# Allegro board CLAYc6r3.brd
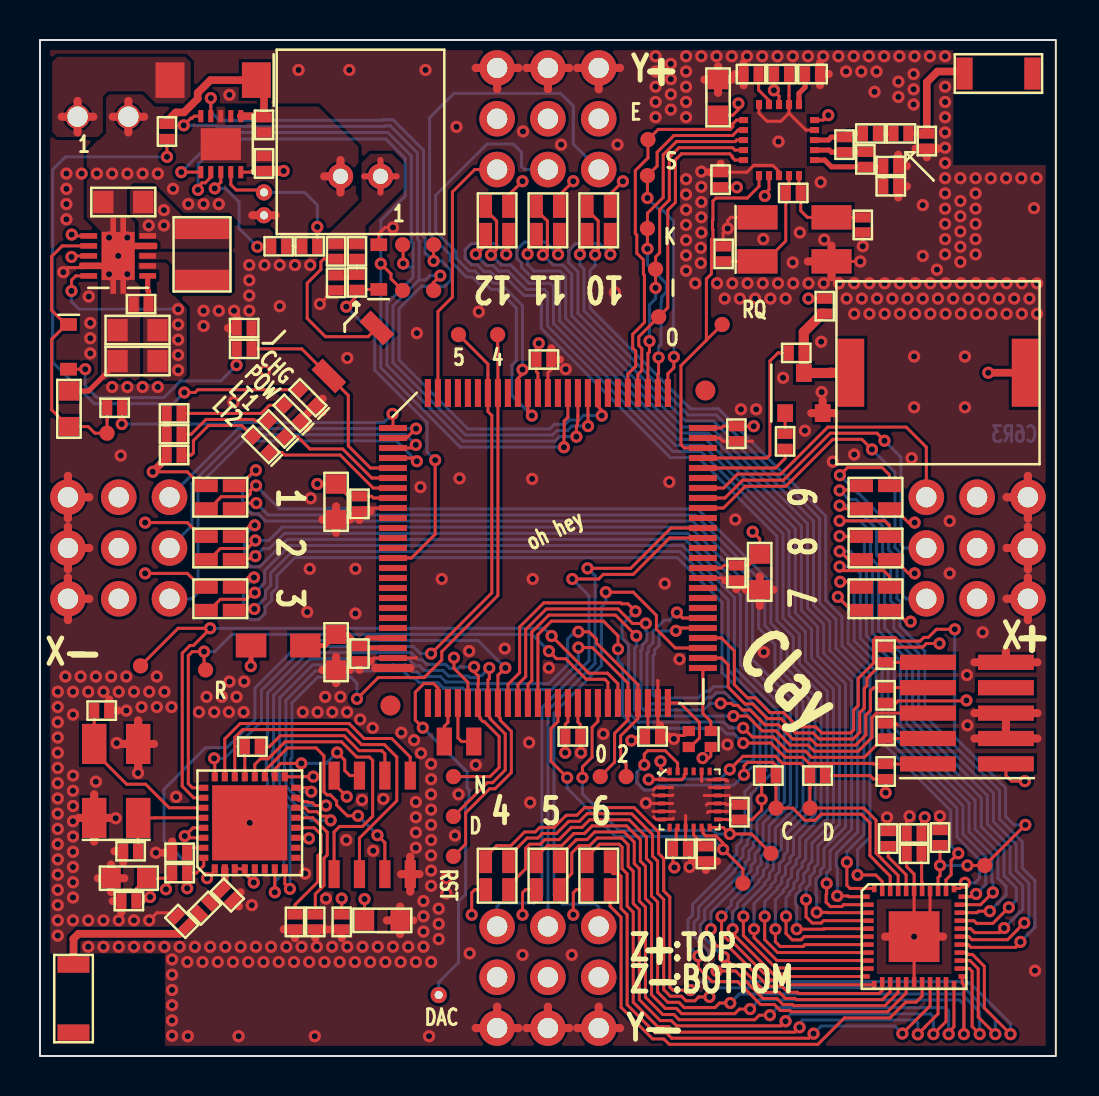
[diagram p0: board, top side]
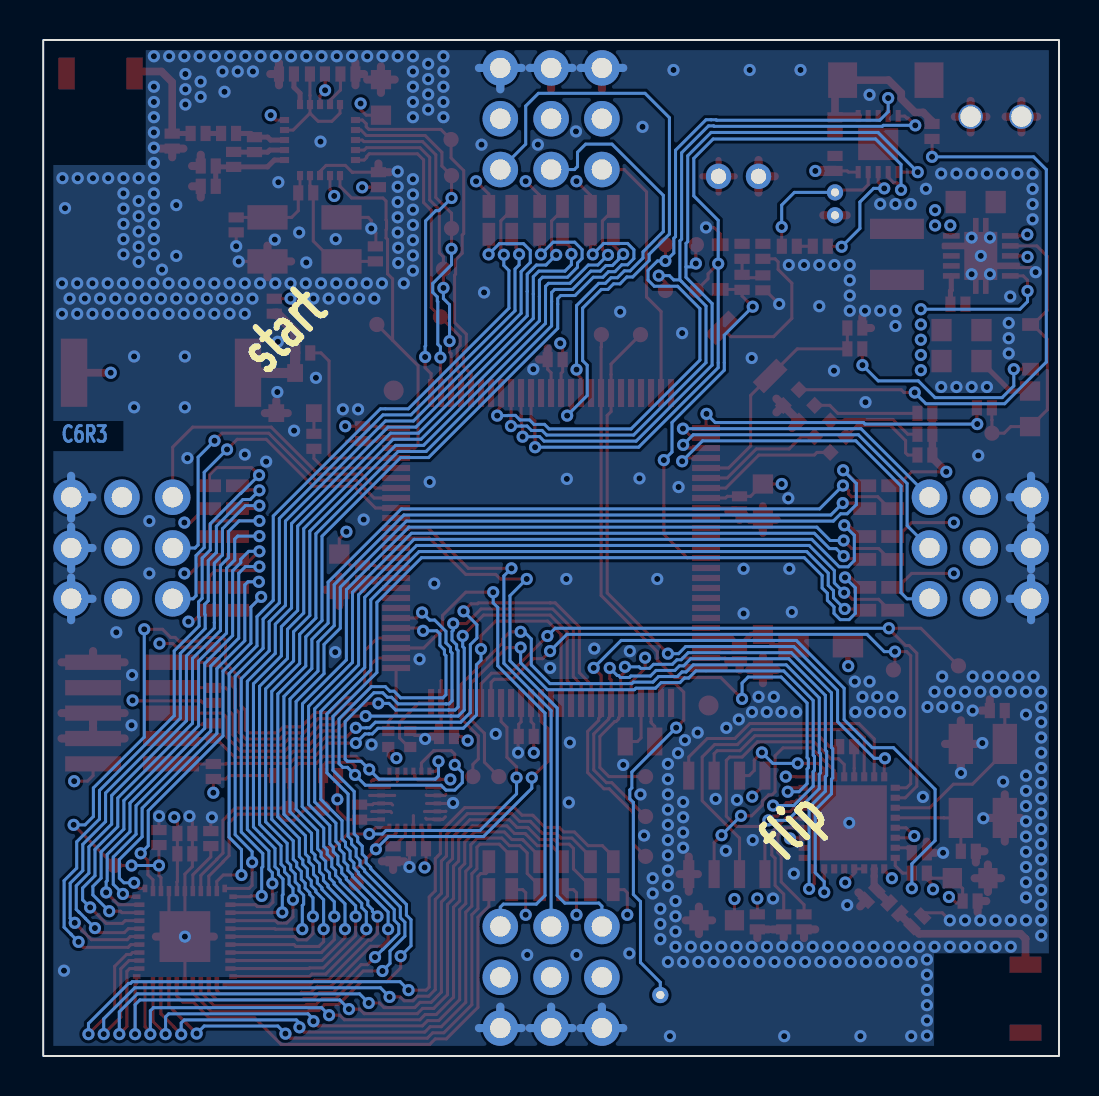
[diagram p1: board, bottom side, seen from below]

Outline 50.8 x 50.8 mm; copper layers: TOP, GND, PWR, BOTTOM. Coordinates in mm from the lower left corner of the outline.

## Placement (name value [footprint] x y rotation side)
AE1  2450AT18A100E  [ANT_1206]  47.93 49.12 0 top
AE2  2450AT18A100E  [ANT_1206]  1.68 2.87 270 top
C1  1uF  [C0402]  11.2 44.63 90 top
C3  1uF  [C0402]  11.2 46.56 270 top
C4  .1uf  [C0402]  34.98 12.19 90 top
C5  .1uf  [C0402]  32.03 10.36 0 top
C6  .1uf  [C0402]  33.3 10.11 270 top
C7  .1uf  [C0402]  34.04 43.81 90 top
C8  .1uf  [C0402]  37.08 49.1 0 top
C9  10uF  [C0603]  33.91 47.93 90 top
C10  1.5pF  [C0402]  43.05 46.13 0 top
C11  1.0pF  [C0402]  44.35 45.75 270 top
C12  2200pF  [C0402]  42.55 44.5 0 top
C13  4.7pF  [C0402]  42.55 43.48 0 top
C14  22pF  [C0402]  34.19 40.11 90 top
C15  22pF  [C0402]  41.15 41.55 270 top
C16  .033uF  [C0402]  35.56 49.1 180 top
C17  1uF  [C0402]  43.71 10.11 180 top
C18  .1uf  [C0402]  43.71 11.13 180 top
C19  .1uf  [C0402]  15.98 20.12 270 top
C20  10uF  [C0603]  14.81 20.19 270 top
C21  .1uf  [C0402]  15.98 27.61 270 top
C22  .1uf  [C0402]  30.63 15.98 0 top
C23  .1uf  [C0402]  25.2 34.82 0 top
C24  .1uf  [C0402]  26.64 15.98 0 top
C25  .1uf  [C0402]  34.82 31.11 270 top
C26  .1uf  [C0402]  34.82 24.16 270 top
C27  10uF  [C0603]  35.99 24.21 270 top
C28  10uF  [C0603]  14.81 27.71 270 top
C29  10uF  [C0805]  4.88 34.75 180 top
C30  10uF  [C0805]  4.17 42.7 180 top
C31  10uF  [C0805]  4.88 36.3 180 top
C32  .1uf  [C0402]  5.05 37.59 180 top
C33  10uF  [C0603]  4.45 8.89 180 top
C34  10uF  [C0603]  17.12 6.78 0 top
C35  .1uf  [C0402]  4.45 7.75 180 top
C36  .1uf  [C0402]  15.09 6.71 270 top
C37  5.6pF  [C0402]  8.23 7.39 225 top
C38  15pF  [C0402]  4.53 10.24 180 top
C39  15pF  [C0402]  3.09 17.27 0 top
C40  10uF  [C0603]  1.45 32.36 90 top
D1  SE20AFJ-M3/6A  [DO_221AC]  8.66 48.79 180 top
D2  4148  [SOD323]  1.42 35.46 270 top
DS1  LB_QH9G_N100_35_1  [LED_0402]  13.39 32.92 135 top
DS2  LB_QH9G_N100_35_1  [LED_0402]  11.83 31.36 135 top
DS3  LB_QH9G_N100_35_1  [LED_0402]  11.05 30.57 135 top
DS4  -  [LTST_C19FD1WT]  27.94 41.78 90 top
DS5  -  [LTST_C19FD1WT]  25.4 41.78 90 top
DS6  -  [LTST_C19FD1WT]  22.86 41.78 90 top
DS7  -  [LTST_C19FD1WT]  9.02 27.94 180 top
DS8  -  [LTST_C19FD1WT]  9.02 25.4 180 top
DS9  -  [LTST_C19FD1WT]  9.02 22.86 180 top
DS10  -  [LTST_C19FD1WT]  27.94 9.02 270 top
DS11  -  [LTST_C19FD1WT]  25.4 9.02 270 top
DS12  -  [LTST_C19FD1WT]  22.86 9.02 270 top
DS13  -  [LTST_C19FD1WT]  41.78 22.86 0 top
DS14  -  [LTST_C19FD1WT]  41.78 25.4 0 top
DS15  -  [LTST_C19FD1WT]  41.78 27.94 0 top
DS16  LB_QH9G_N100_35_1  [LED_0402]  12.61 32.14 135 top
J1  640456-2  [2X1_HEADER_100]  1.88 46.96 0 top
J2  S2B-PH-K-S(LF)(SN)  [JST2_SIDE_PTH]  16.03 46.58 0 top
J3  GPIO_3x3_100  [GPIO_3X3_100]  25.4 3.94 0 top
J4  GPIO_3x3_100  [GPIO_3X3_100]  25.4 46.86 180 top
J5  GPIO_3x3_100  [GPIO_3X3_100]  3.94 25.4 270 top
J6  GPIO_3x3_100  [GPIO_3X3_100]  46.86 25.4 90 top
J7  2x5 SMT  [FTSH_10]  46.35 17.14 90 top
L1  3.9nH  [L0402]  41.53 46.13 0 top
L2  8.2nH  [L0402]  40.23 45.57 90 top
L3  2.7nH  [L0402]  41.27 44.83 270 top
L4  600 Ohm  [FERRITE0805]  11.91 20.52 180 top
L5  2.2uH  [L1210]  8.1 40.08 270 top
L6  DNP  [L0402]  9.37 8.05 135 top
L7  DNP  [L0402]  7.09 6.73 315 top
LS1  PKMCS0909E4000-R1  [PKMCS]  44.91 34.16 0 top
NOREF  -  []  0 50.8 0 top
NOREF#2  -  []  0 0 90 top
NOREF#3  -  []  25.4 25.4 0 top
Q1  3904  [SOT23_3]  38.2 33.15 180 top
R1  200  [R0402]  6.35 46.23 90 top
R2  30  [R0402]  6.71 31.09 180 top
R3  30  [R0402]  6.71 30.05 180 top
R5  10k  [R0402]  13.49 40.49 0 top
R6  3.0k  [R0402]  11.94 40.49 180 top
R7  1.0K  [R0402]  39.24 37.49 90 top
R8  1.0K  [R0402]  37.82 35.15 0 top
R9  1.0K  [R0402]  37.26 30.73 90 top
R10  10k  [R0402]  38.89 14.02 0 top
R11  10k  [R0402]  36.42 14.02 180 top
R12  1M  [R0402]  37.67 43.15 0 top
R13  22k  [R0402]  38.63 49.1 180 top
R14  100k  [R0402]  45.01 10.92 270 top
R15  7.68k  [R0402]  42.42 10.87 270 top
R16  10k  [R0402]  42.29 20.07 270 top
R17  10k  [R0402]  42.29 18.03 90 top
R18  10k  [R0402]  42.29 16.26 270 top
R19  10k  [R0402]  42.29 14.22 90 top
R21  200  [R0402]  6.71 32.13 180 top
R23  10k  [R0402]  12.75 6.71 90 top
R24  10k  [R0402]  13.77 6.71 90 top
R25  10k  [R0402]  6.98 9.14 180 top
R26  200  [R0402]  10.62 15.47 0 top
R27  12k  [R0402]  6.98 10.16 0 top
R28  100k  [R0402]  15.85 40.23 90 top
R29  100k  [R0402]  15.85 38.68 90 top
R30  220k  [R0402]  14.81 38.66 90 top
R31  10k  [R0402]  3.73 32.41 0 top
R32  100k  [R0402]  14.81 40.23 90 top
R33  10k  [R0402]  10.21 35.36 180 top
R34  100k  [R0402]  10.21 36.4 0 top
SW1  B3U-1000P  [TAC_SWITCH_B3U_1000P]  15.65 35.2 225 top
TP1  TP  [TP_030]  38.51 12.4 0 top
TP2  TP  [TP_030]  36.8 12.4 0 top
TP3  TP  [TP_030]  35.15 8.64 0 top
TP4  TP  [TP_030]  36.55 10.13 0 top
TP5  TP  [TP_030]  30.4 45.82 90 top
TP6  TP  [TP_030]  30.38 44.02 90 top
TP7  TP  [TP_030]  30.38 41.38 90 top
TP8  TP  [TP_030]  30.78 39.34 90 top
TP9  TP  [TP_030]  30.94 36.96 90 top
TP10  TP  [TP_030]  34.11 36.58 90 top
TP11  TP  [TP_030]  47.24 9.52 0 top
TP12  TP  [TP_030]  8.28 19.3 0 top
TP13  TP  [TP_030]  5.03 19.51 0 top
TP14  TP  [TP_030]  20.68 9.98 0 top
TP15  TP  [TP_030]  28.02 13.97 0 top
TP16  TP  [TP_030]  29.31 13.97 0 top
TP17  TP  [TP_030]  20.68 11.98 0 top
TP18  TP  [TP_030]  20.68 13.97 0 top
TP19  TP  [TP_030]  19.68 40.56 0 top
TP20  TP  [TP_030]  19.68 38.28 0 top
TP21  TP  [TP_030]  18.14 40.56 0 top
TP22  TP  [TP_030]  18.14 38.28 0 top
TP23  TP  [TP_030]  3.35 31.14 0 top
TP24  TP  [TP_030]  20.93 36.07 0 top
TP25  TP  [TP_030]  22.89 36.07 0 top
U1  LM3658  [WSON10_3X3]  9.04 45.59 180 top
U2  MPU9250  [QFN24_3X3]  32.49 12.83 0 top
U3  NRF24L01P  [QFN20_4X4]  36.96 45.8 0 top
U4  IS31FL3236  [QFN44_5X5]  43.71 5.97 0 top
U5  MK64FN1M0VLL12  [QFP100_14X14]  25.4 25.4 0 top
U6  TPS61201DRCT  [VSON10_3X3]  3.91 40 90 top
U7  ESP8266EX  [QFN32_5X5]  10.49 11.66 90 top
U8  W25Q80DVSNIG  [CL_SOIC8]  16.61 11.56 0 top
W1  26AWG  [WIRE_26AWG]  19.94 3.05 0 top
W2  26AWG  [WIRE_26AWG]  11.2 43.18 0 top
W3  26AWG  [WIRE_26AWG]  11.2 42.04 0 top
Y1  16MHz  [TXC_XTAL_5X3]  37.73 40.83 0 top
Y2  8MHz  [ASCO]  32.99 15.85 180 top
Y3  34.728kHz  [ABS06]  20.95 15.72 0 top
Y4  26MHz  [TXC_XTAL_5X3]  3.81 13.75 90 top
Z1  MM3Z3VST1G  [SOD323]  16.94 39.45 90 top

## Library data of the parts
AE1 AE2 = ANTENNA
C1 C3-C40 = CAP_NP
D1 D2 = DIODE
DS1-DS3 DS16 = LED
DS4-DS15 = LTST_C19FD1WT
J1 J2 = CON_2PIN
J3-J6 = GPIO_3X3_100
J7 = CON_10PIN
L1-L3 L5-L7 = INDUCTOR
L4 = FERRITE
LS1 = BUZZER
Q1 = NPN
R1-R3 R5-R19 R21 R23-R34 = RESISTOR
SW1 = SPST_NO
TP1-TP25 = TESTPOINT
U1 = LM3658
U2 = MPU9250
U3 = NRF24L01
U4 = IS31FL3236
U5 = MK64FN1M0VLL12
U6 = TPS61201
U7 = ESP8266EX
U8 = W25Q
W1-W3 = WIRE
Y1 Y4 = CRYSTAL_4
Y2 = ASCO_OSC
Y3 = CRYSTAL
Z1 = ZENER

## Footprints (pads in the part's own frame, mm; a bottom-side part is the same pattern mirrored in y, then rotated)
2X1_HEADER_100
  round 1.219 hole 1.016: 1(0,0) 2(2.54,0)
ABS06
  rect 0.762x1.397 smd: 1(-0.737,0) 2(0.737,0)
ANT_1206
  rect 0.813x1.6 smd: 1(-1.7,0) 2(1.7,0)
ASCO
  rect 0.61x0.508 smd: 1(-0.55,-0.4) 2(0.55,-0.4) 3(0.55,0.4) 4(-0.55,0.4)
C0402
  rect 0.508x0.762 smd: 1(-0.375,0) 2(0.375,0)
C0603
  rect 0.965x1.016 smd: 1(-0.889,0) 2(0.889,0)
C0805
  rect 1.016x1.118 smd: 1(-1,0) 2(1,0)
CL_SOIC8
  rect 0.559x1.397 smd: 1(-1.905,-2.464) 2(-0.635,-2.464) 3(0.635,-2.464) 4(1.905,-2.464) 5(1.905,2.464) 6(0.635,2.464) 7(-0.635,2.464) 8(-1.905,2.464)
DO_221AC
  rect 1.448x1.778 smd: 1(-2.159,0) 2(2.159,0)
FERRITE0805
  rect 1.524x1.194 smd: 1(-1.359,0) 2(1.359,0)
FTSH_10
  rect 0.762x2.794 smd: 1(-2.54,-1.95) 2(-2.54,1.95) 3(-1.27,-1.95) 4(-1.27,1.95) 5(0,-1.95) 6(0,1.95) 7(1.27,-1.95) 8(1.27,1.95) 9(2.54,-1.95) 10(2.54,1.95)
GPIO_3X3_100
  round 1.778 hole 1.016: 1(-2.54,2.54) 2(0,2.54) 3(2.54,2.54) 4(-2.54,0) 5(0,0) 6(2.54,0) 7(-2.54,-2.54) 8(0,-2.54) 9(2.54,-2.54)
JST2_SIDE_PTH
  round 1.27 hole 0.762: 1(1,-2.6) 2(-1,-2.6)
L0402
  rect 0.508x0.762 smd: 1(-0.375,0) 2(0.375,0)
L1210
  rect 1.016x2.692 smd: 1(-1.275,0) 2(1.275,0)
LED_0402
  rect 0.61x0.61 smd: 1(-0.559,0) 2(0.559,0)
LTST_C19FD1WT
  rect 1.143x0.635 smd: 1(0.699,0.572) 2(-0.699,0.572) 3(-0.699,-0.572) 4(0.699,-0.572)
PKMCS
  rect 1.321x3.404 smd: 1(-4.35,0) 2(4.35,0)
QFN20_4X4
  rect 0.457x0.305 smd: 1(-1.775,1.001) 2(-1.775,0.501) 3(-1.775,0.001) 4(-1.775,-0.499) 5(-1.775,-0.999) 11(1.775,-0.999) 12(1.775,-0.499) 13(1.775,0.001) 14(1.775,0.501) 15(1.775,1.001)
  rect 0.305x0.457 smd: 6(-1.001,-1.775) 7(-0.501,-1.775) 8(-0.001,-1.775) 9(0.499,-1.775) 10(0.999,-1.775) 16(0.999,1.775) 17(0.499,1.775) 18(-0.001,1.775) 19(-0.501,1.775) 20(-1.001,1.775)
QFN24_3X3
  rect 0.381x0.203 smd: 1(-1.402,1) 2(-1.402,0.6) 3(-1.402,0.2) 4(-1.402,-0.2) 5(-1.402,-0.6) 6(-1.402,-1) 13(1.412,-1) 14(1.412,-0.6) 15(1.412,-0.2) 16(1.412,0.2) 17(1.412,0.6) 18(1.412,1)
  rect 0.203x0.381 smd: 7(-1,-1.402) 8(-0.6,-1.402) 9(-0.2,-1.402) 10(0.2,-1.402) 11(0.6,-1.402) 12(1,-1.402) 19(1,1.402) 20(0.6,1.402) 21(0.2,1.402) 22(-0.2,1.402) 23(-0.6,1.402) 24(-1,1.402)
QFN32_5X5
  rect 0.457x0.305 smd: 1(-2.301,1.75) 2(-2.301,1.25) 3(-2.301,0.749) 4(-2.301,0.249) 5(-2.301,-0.251) 6(-2.301,-0.752) 7(-2.301,-1.252) 8(-2.301,-1.753) 17(2.301,-1.753) 18(2.301,-1.252) 19(2.301,-0.752) 20(2.301,-0.251) 21(2.301,0.249) 22(2.301,0.749) 23(2.301,1.25) 24(2.301,1.75)
  rect 0.305x0.457 smd: 9(-1.75,-2.301) 10(-1.25,-2.301) 11(-0.749,-2.301) 12(-0.249,-2.301) 13(0.251,-2.301) 14(0.752,-2.301) 15(1.252,-2.301) 16(1.753,-2.301) 25(1.753,2.301) 26(1.252,2.301) 27(0.752,2.301) 28(0.251,2.301) 29(-0.249,2.301) 30(-0.749,2.301) 31(-1.25,2.301) 32(-1.75,2.301)
  rect 3.759x3.759 smd: 33(0,0)
QFN44_5X5
  rect 0.381x0.229 smd: 1(-2.409,1.994) 11(-2.409,-1.994) 23(2.409,-1.994) 33(2.409,1.994)
  rect 0.508x0.229 smd: 2(-2.276,1.595) 3(-2.276,1.196) 4(-2.276,0.798) 5(-2.276,0.399) 6(-2.276,0) 7(-2.276,-0.399) 8(-2.276,-0.798) 9(-2.276,-1.196) 10(-2.276,-1.595) 24(2.276,-1.595) 25(2.276,-1.196) 26(2.276,-0.798) 27(2.276,-0.399) 28(2.276,0) 29(2.276,0.399) 30(2.276,0.798) 31(2.276,1.196) 32(2.276,1.595)
  rect 0.229x0.381 smd: 12(-1.994,-2.409) 22(1.994,-2.409) 34(1.994,2.409) 44(-1.994,2.409)
  rect 0.229x0.508 smd: 13(-1.595,-2.276) 14(-1.196,-2.276) 15(-0.798,-2.276) 16(-0.399,-2.276) 17(0,-2.276) 18(0.399,-2.276) 19(0.798,-2.276) 20(1.196,-2.276) 21(1.595,-2.276) 35(1.595,2.276) 36(1.196,2.276) 37(0.798,2.276) 38(0.399,2.276) 39(0,2.276) 40(-0.399,2.276) 41(-0.798,2.276) 42(-1.196,2.276) 43(-1.595,2.276)
  rect 2.54x2.54 smd: 45(0,0)
QFP100_14X14
  round 1 smd: (-7.874,-7.874) (7.874,7.874)
  rect 1.397x0.305 smd: 1(-7.75,6) 2(-7.75,5.5) 3(-7.75,5) 4(-7.75,4.5) 5(-7.75,4) 6(-7.75,3.5) 7(-7.75,3) 8(-7.75,2.5) 9(-7.75,2) 10(-7.75,1.5) 11(-7.75,1) 12(-7.75,0.5) 13(-7.75,0) 14(-7.75,-0.5) 15(-7.75,-1) 16(-7.75,-1.5) 17(-7.75,-2) 18(-7.75,-2.5) 19(-7.75,-3) 20(-7.75,-3.5) 21(-7.75,-4) 22(-7.75,-4.5) 23(-7.75,-5) 24(-7.75,-5.5) 25(-7.75,-6) 51(7.75,-6) 52(7.75,-5.5) 53(7.75,-5) 54(7.75,-4.5) 55(7.75,-4) 56(7.75,-3.5) 57(7.75,-3) 58(7.75,-2.5) 59(7.75,-2) 60(7.75,-1.5) 61(7.75,-1) 62(7.75,-0.5) 63(7.75,0) 64(7.75,0.5) 65(7.75,1) 66(7.75,1.5) 67(7.75,2) 68(7.75,2.5) 69(7.75,3) 70(7.75,3.5) 71(7.75,4) 72(7.75,4.5) 73(7.75,5) 74(7.75,5.5) 75(7.75,6)
  rect 0.305x1.397 smd: 26(-6,-7.75) 27(-5.5,-7.75) 28(-5,-7.75) 29(-4.5,-7.75) 30(-4,-7.75) 31(-3.5,-7.75) 32(-3,-7.75) 33(-2.5,-7.75) 34(-2,-7.75) 35(-1.5,-7.75) 36(-1,-7.75) 37(-0.5,-7.75) 38(0,-7.75) 39(0.5,-7.75) 40(1,-7.75) 41(1.5,-7.75) 42(2,-7.75) 43(2.5,-7.75) 44(3,-7.75) 45(3.5,-7.75) 46(4,-7.75) 47(4.5,-7.75) 48(5,-7.75) 49(5.5,-7.75) 50(6,-7.75) 76(6,7.75) 77(5.5,7.75) 78(5,7.75) 79(4.5,7.75) 80(4,7.75) 81(3.5,7.75) 82(3,7.75) 83(2.5,7.75) 84(2,7.75) 85(1.5,7.75) 86(1,7.75) 87(0.5,7.75) 88(0,7.75) 89(-0.5,7.75) 90(-1,7.75) 91(-1.5,7.75) 92(-2,7.75) 93(-2.5,7.75) 94(-3,7.75) 95(-3.5,7.75) 96(-4,7.75) 97(-4.5,7.75) 98(-5,7.75) 99(-5.5,7.75) 100(-6,7.75)
R0402
  rect 0.508x0.762 smd: 1(-0.375,0) 2(0.375,0)
SOD323
  rect 0.635x0.838 smd: 1(-1.118,0) 2(1.118,0)
SOT23_3
  rect 0.787x0.889 smd: 1(0.94,1.003) 2(-0.94,1.003) 3(0,-1.003)
TAC_SWITCH_B3U_1000P
  rect 0.787x1.676 smd: 1(-1.7,0) 2(1.7,0)
TP_030
  round 0.762 smd: 1(0,0)
TXC_XTAL_5X3
  rect 2.007x1.219 smd: 1(-1.85,-1.1) 2(1.85,-1.1) 3(1.85,1.1) 4(-1.85,1.1)
VSON10_3X3
  rect 0.279x0.838 smd: 1(-1,-1.475) 2(-0.5,-1.475) 3(0,-1.475) 4(0.5,-1.475) 5(1,-1.475) 6(1,1.475) 7(0.5,1.475) 8(0,1.475) 9(-0.5,1.475) 10(-1,1.475)
  custom 3.8x1.65 smd: 11(0,0)
WIRE_26AWG
  round 0.813 hole 0.406: 1(0,0)
WSON10_3X3
  rect 0.254x0.61 smd: 1(-1,-1.4) 2(-0.5,-1.4) 3(0,-1.4) 4(0.5,-1.4) 5(0.999,-1.4) 6(0.999,1.4) 7(0.5,1.4) 8(0,1.4) 9(-0.5,1.4) 10(-1,1.4)
  rect 2.007x1.6 smd: 11(0,0)

## Nets
GND: C4.2 C5.2 C6.2 C7.2 C8.2 C9.2 C11.2 C12.2 C13.2 C14.2 C15.2 C16.2 C17.2 C18.2 C19.2 C20.2 C21.2 C22.2 C23.2 C24.2 C25.2 C26.2 C27.2 C28.2 C33.2 C34.2 C35.2 C36.2 C38.2 C39.2 DS1.1(C) DS16.1(C) J3.7(GND2) J3.8(GND1) J3.9(GND) J4.7(GND2) J4.8(GND1) J4.9(GND) J5.7(GND2) J5.8(GND1) J5.9(GND) J6.7(GND2) J6.8(GND1) J6.9(GND) J7.3 J7.5 J7.9 L6.1 L7.1 Q1.2(E) R13.1 R14.1 R15.1 R18.1 R23.1 R24.1 R27.1 R30.1 R34.1 U2.2(NC5) U2.3(NC4) U2.4(NC3) U2.5(NC2) U2.6(NC) U2.9(AD0/SDO) U2.14(NC6) U2.15(NC7) U2.16(NC8) U2.17(NC9) U2.18(GND) U2.20(RESV_GND) U3.8(VSS#8) U3.14(VSS#14) U3.17(VSS#17) U3.20(VSS#20) U4.17(GND#17) U4.37(AD) U4.39(GND#39) U4.45(GND#45) U5.9(VSS#9) U5.24(VREFL) U5.25(VSSA) U5.41(VSS#41) U5.49(VSS#49) U5.60(VSS#60) U5.74(VSS#74) U5.88(VSS#88) U6.9(GND) U7.33(GND) U8.4(GND) Y1.2(GND) Y1.4(GND4) Y2.2(GND) Y4.2(GND) Y4.4(GND4) Z1.2(A)
GND_EARTH: C1.2 C3.2 C29.2 C30.2 C31.2 C32.2 C40.2 J1.2 J2.2 R5.1 R6.1 U1.3(GND#3) U1.11(GND#11) U6.4(PGND) U6.11(PGND2) W3.1
VBAT: C1.1 C30.1 J2.1 L5.1 R28.2 R32.2 U1.10(BATT) U6.5(VIN) U6.6(EN) U6.8(PS)
VBAT_ADC: R29.1 U5.14(ADC0_DP1) Z1.1(K)
VCC: C4.1 C5.1 C7.1 C8.1 C9.1 C17.1 C18.1 C21.1 C22.1 C23.1 C24.1 C25.1 C26.1 C27.1 C28.1 C29.1 C31.1 C33.1 C34.1 C35.1 C36.1 DS4.4(VDD) DS5.4(VDD) DS6.4(VDD) DS7.4(VDD) DS8.4(VDD) DS9.4(VDD) DS10.4(VDD) DS11.4(VDD) DS12.4(VDD) DS13.4(VDD) DS14.4(VDD) DS15.4(VDD) J3.4(VDD) J3.5(VDD1) J3.6(VDD2) J4.4(VDD) J4.5(VDD1) J4.6(VDD2) J5.4(VDD) J5.5(VDD1) J5.6(VDD2) J6.4(VDD) J6.5(VDD1) J6.6(VDD2) J7.1 L4.2 LS1.2 R2.2 R3.2 R7.2 R10.2 R11.2 R16.1 R17.1 R19.1 R21.2 R25.2 U2.1(RESV_VCC) U2.8(VDDIO#8) U2.13(VDDIO#13) U2.22(NCS) U3.7(VDD#7) U3.15(VDD#15) U3.18(VDD#18) U4.38(VCC) U5.8(VDD#8) U5.30(VBAT) U5.40(VDD#40) U5.48(VDD#48) U5.61(VDD#61) U5.75(VDD#75) U5.89(VDD#89) U6.2(VOUT) U6.10(FB) U7.1(VDDA#1) U7.3(VDD3P3#3) U7.4(VDD3P3#4) U7.11(VDDPST#11) U7.17(VDDPST#17) U7.29(VDDD) U7.30(VDDA#30) U8.8(VCC) Y2.4(VDD)
VDD_RTC: U7.5(VDD_RTC)
#CS: U7.20(SD_CMD) U8.1(C\S\)
#HOLD: U7.18(SD_DATA_2) U8.7(H\O\L\D\)
#RST: J7.10 R16.2 U5.52(RESET_B)
#WP: U7.19(SD_DATA_3) U8.3(W\P\)
ADC0_DM0/ADC1_DM3: U5.19(ADC0_DM0/ADC1_DM3)
ADC0_DM1: U5.15(ADC0_DM1)
ADC0_DP0/ADC1_DP3: U5.18(ADC0_DP0/ADC1_DP3)
ADC1_DM0/ADC0_DM3: U5.21(ADC1_DM0/ADC0_DM3)
ADC1_DM1: U5.17(ADC1_DM1)
ADC1_DP0/ADC0_DP3: U5.20(ADC1_DP0/ADC0_DP3)
ADC1_DP1: U5.16(ADC1_DP1)
BUTTONOUT: R33.1 R34.2 SW1.2 U5.5(PTE4/LLWU_P2/SPI1_PCS0/UART3_TX)
BUZZER_LINE: R8.1 U5.72(PTC2/ADC0_SE4B/CMP1_IN0/SPI0_PC)
BUZZER_SWITCH: R9.1 U5.71(PTC1/LLWU_P6/ADC0_SE15/SPI0_PCS)
CLK: R26.2 U8.6(CLK)
DAC_OUT: U5.27(DAC0_OUT/CMP1_IN3/ADC0_SE23) W1.1
DI: U7.23(SD_DATA_1) U8.5(DI)
DO: U7.22(SD_DATA_0) U8.2(DO)
EN_B: TP19.1 U1.4(USB_SEL) U5.83(PTC11/LLWU_P11/ADC1_SE7B/I2C1_S)
FSYNC: TP3.1 U2.11(FSYNC) U5.39(PTA5/USB_CLKIN/FTM0_CH2/MII0_RX)
GPIO1: J6.3(GPIO3) U5.69(PTB23/SPI2_SIN/SPI0_PCS5/FB_AD2)
GPIO2: J6.2(GPIO2) U5.68(PTB22/SPI2_SOUT/FB_AD29/CMP2_OU)
GPIO3: J6.1(GPIO1) U5.67(PTB21/SPI2_SCK/FB_AD30/CMP1_OUT)
GPIO4: J3.3(GPIO3) U5.53(PTB0/LLWU_P5/ADC0_SE8/ADC1_SE8/)
GPIO5: J3.2(GPIO2) U5.65(PTB19/CAN0_RX/FTM2_CH1/I2S0_TX_)
GPIO6: J3.1(GPIO1) U5.64(PTB18/CAN0_TX/FTM2_CH0/I2S0_TX_)
GPIO7: J5.3(GPIO3) U5.4(PTE3/ADC0_DM2/ADC1_SE7A/SPI1_SI)
GPIO8: J5.2(GPIO2) U5.3(PTE2/LLWU_P1/ADC0_DP2/ADC1_SE6A)
GPIO9: J5.1(GPIO1) U5.2(PTE1/LLWU_P0/ADC1_SE5A/SPI1_SOU)
GPIO10: J4.3(GPIO3) U5.99(PTD6/LLWU_P16/ADC0_SE7B/SPI0_PC)
GPIO11: J4.2(GPIO2) U5.91(PTC17/UART3_TX/ENET0_1588_TMR1/)
GPIO12: J4.1(GPIO1) U5.90(PTC16/UART3_RX/ENET0_1588_TMR0/)
IMU_INT: TP4.1 U2.12(INT) U5.43(PTA13/LLWU_P4/CMP2_IN1/CAN0_RX/)
LED1: DS2.1(C) U5.6(PTE5/SPI1_PCS2/UART3_RX/SDHC0_D)
LED2: DS3.1(C) U5.7(PTE6/SPI1_PCS3/UART3_CTS_B/I2S0)
MESH_#CS: TP6.1 U3.2(CSN) U5.76(PTC4/LLWU_P8/SPI0_PCS0/UART1_TX)
MESH_CE: TP5.1 U3.1(CE) U5.80(PTC8/ADC1_SE4B/CMP0_IN2/FTM3_CH)
MESH_IRQ: TP10.1 U3.6(IRQ) U5.73(PTC3/LLWU_P7/CMP1_IN1/SPI0_PCS1)
MISO0: TP9.1 U3.5(MISO) U5.79(PTC7/CMP0_IN1/SPI0_SIN/USB_SOF_)
MOSI0: TP8.1 U3.4(MOSI) U5.78(PTC6/LLWU_P10/CMP0_IN0/SPI0_SOU)
POWERON: R31.2 U5.1(PTE0/ADC1_SE4A/SPI1_PCS1/UART1_)
PTA0/JTAG_TCLK/SWD_CLK/EZP_CLK/: J7.4 R18.2 U5.34(PTA0/JTAG_TCLK/SWD_CLK/EZP_CLK/)
PTA1/JTAG_TDI/EZP_DI/UART0_RX/F: J7.8 R17.2 U5.35(PTA1/JTAG_TDI/EZP_DI/UART0_RX/F)
PTA2/JTAG_TDO/TRACE_SWO/EZP_D0/: J7.6 U5.36(PTA2/JTAG_TDO/TRACE_SWO/EZP_D0/)
PTA3/JTAG_TMS/SWD_DIO/UART0_RTS: J7.2 R19.2 U5.37(PTA3/JTAG_TMS/SWD_DIO/UART0_RTS)
PTA4/LLWU_P3/NMI_B/EZP_CS_B/FTM: U5.38(PTA4/LLWU_P3/NMI_B/EZP_CS_B/FTM)
PTA12/CMP2_IN0/CAN0_TX/FTM1_CH0: U5.42(PTA12/CMP2_IN0/CAN0_TX/FTM1_CH0)
PTA18/EXTAL0/FTM0_FLT2/FTM_CLKI: U5.50(PTA18/EXTAL0/FTM0_FLT2/FTM_CLKI) Y2.3(OUT)
PTA19/XTAL0/FTM1_FLT0/FTM_CLKIN: U5.51(PTA19/XTAL0/FTM1_FLT0/FTM_CLKIN) Y2.1(EN)
PTB9/SPI1_PCS1/UART3_CTS_B/FB_A: U5.57(PTB9/SPI1_PCS1/UART3_CTS_B/FB_A)
PTB10/ADC1_SE14/SPI1_PCS0/UART3: U5.58(PTB10/ADC1_SE14/SPI1_PCS0/UART3)
PTB11/ADC1_SE15/SPI1_SCK/UART3_: U5.59(PTB11/ADC1_SE15/SPI1_SCK/UART3_)
PTB16/SPI1_SOUT/UART0_RX/FTM_CL: U5.62(PTB16/SPI1_SOUT/UART0_RX/FTM_CL)
PTB17/SPI1_SIN/UART0_TX/FTM_CLK: U5.63(PTB17/SPI1_SIN/UART0_TX/FTM_CLK)
PTB20/SPI2_PCS0/FB_AD31/CMP0_OU: U5.66(PTB20/SPI2_PCS0/FB_AD31/CMP0_OU)
PTC0/ADC0_SE14/SPI0_PCS4/PDB0_E: U5.70(PTC0/ADC0_SE14/SPI0_PCS4/PDB0_E)
PTC9/ADC1_SE5B/CMP0_IN3/FTM3_CH: U5.81(PTC9/ADC1_SE5B/CMP0_IN3/FTM3_CH)
PTC10/ADC1_SE6B/I2C1_SCL/FTM3_C: U5.82(PTC10/ADC1_SE6B/I2C1_SCL/FTM3_C)
PTC15/UART4_TX/FB_AD24: U5.87(PTC15/UART4_TX/FB_AD24)
PTC18/UART3_RTS_B/ENET0_1588_TM: U5.92(PTC18/UART3_RTS_B/ENET0_1588_TM)
PTD2/LLWU_P13/SPI0_SOUT/UART2_R: U5.95(PTD2/LLWU_P13/SPI0_SOUT/UART2_R)
PTD3/SPI0_SIN/UART2_TX/FTM3_CH3: U5.96(PTD3/SPI0_SIN/UART2_TX/FTM3_CH3)
PTD4/LLWU_P14/SPI0_PCS1/UART0_R: U5.97(PTD4/LLWU_P14/SPI0_PCS1/UART0_R)
PTD5/ADC0_SE6B/SPI0_PCS2/UART0_: U5.98(PTD5/ADC0_SE6B/SPI0_PCS2/UART0_)
PTD7/CMT_IRQ/UART0_TX/FTM0_CH7/: U5.100(PTD7/CMT_IRQ/UART0_TX/FTM0_CH7/)
SCK0: TP7.1 U3.3(SCK) U5.77(PTC5/LLWU_P9/SPI0_SCK/LPTMR0_AL)
SCL0: R11.1 TP2.1 U2.23(SCL/SCLK) U4.42(SCL) U5.55(PTB2/ADC0_SE12/I2C0_SCL/UART0_R)
SDA0: R10.1 TP1.1 U2.24(SDA/SDI) U4.41(SDA) U5.56(PTB3/ADC0_SE13/I2C0_SDA/UART0_C)
SDB: R14.2 TP11.1 U4.36(SDB) U5.54(PTB1/ADC0_SE9/ADC1_SE9/I2C0_SDA)
STAT1: TP22.1 U1.7(STAT1) U5.86(PTC14/UART4_RX/FB_AD25)
STAT2: TP21.1 U1.6(STAT2) U5.85(PTC13/UART4_CTS_B/FB_AD26)
USB0_DM: U5.11(USB0_DM)
USB0_DP: U5.10(USB0_DP)
USB_SEL: TP20.1 U1.5(EN_B) U5.84(PTC12/UART4_RTS_B/FB_AD27/FTM3_)
USBPWR: U1.2(USBPWR)
VOUT33: U5.12(VOUT33)
VREF_OUT/CMP1_IN5/CMP0_IN5/ADC1: U5.26(VREF_OUT/CMP1_IN5/CMP0_IN5/ADC1)
VREGIN: U5.13(VREGIN)
WIFI_#RESET: R25.1 TP14.1 U5.33(PTE26/ENET_1588_CLKIN/UART4_CTS) U7.32(EXT_RSTB)
WIFI_CHIP_EN: TP18.1 U5.31(PTE24/ADC0_SE17/UART4_TX/I2C0__) U7.7(CHIP_EN)
WIFI_GPIO0: TP15.1 U5.46(PTA16/SPI0_SOUT/UART0_CTS_B/UAR) U7.15(GPIO0)
WIFI_GPIO2: TP16.1 U5.47(PTA17/ADC1_SE17/SPI0_SIN/UART0_) U7.14(GPIO2)
WIFI_GPIO4: TP25.1 U5.93(PTD0/LLWU_P12/SPI0_PCS0/UART2_R) U7.16(GPIO4)
WIFI_GPIO5: TP24.1 U5.94(PTD1/ADC0_SE5B/SPI0_SCK/UART2_C) U7.24(GPIO5)
WIFI_RX: TP12.1 U5.44(PTA14/SPI0_PCS0/UART0_TX/MII0_R) U7.25(U0RXD)
WIFI_TX: TP13.1 U5.45(PTA15/SPI0_SCK/UART0_RX/MII0_TX) U7.26(U0TXD)
WIFI_XPD_DCDC: TP17.1 U5.32(PTE25/ADC0_SE18/UART4_RX/I2C0_S) U7.8(XPD_DCDC)
N00198: LS1.1 Q1.3(C) R7.1 R8.2
N00230: R13.2 U3.16(IREF)
N00299: R5.2 U1.9(TS) W2.1
N00337: R6.2 U1.8(ISET)
N00355: L5.2 U6.3(L)
N00409: C15.1 R12.2 U3.10(XC1) Y1.3
N00478: C32.1 U6.1(VAUX)
N00507: C14.1 R12.1 U3.9(XC2) Y1.1
N00519: Q1.1(B) R9.2
N00975: R15.2 U4.40(R_EXT)
N01220: DS16.2(A) R21.1
N01340: C16.1 U3.19(DVDD)
N01687: DS5.1(BLUE) U4.2(OUT4)
N01689: DS5.2(RED) U4.3(OUT5)
N01691: DS5.3(GREEN) U4.4(OUT6)
N01749: DS6.1(BLUE) U4.5(OUT7)
N01755: DS6.2(RED) U4.6(OUT8)
N01761: DS6.3(GREEN) U4.7(OUT9)
N02099: R26.1 U7.21(SD_CLK)
N02614: C6.1 U2.10(REGOUT)
N02615: DS7.1(BLUE) U4.8(OUT10)
N02621: DS7.2(RED) U4.9(OUT11)
N02627: DS7.3(GREEN) U4.10(OUT12)
N02738: DS8.1(BLUE) U4.11(OUT13)
N02744: DS8.2(RED) U4.12(OUT14)
N02750: DS8.3(GREEN) U4.13(OUT15)
N02922: DS9.1(BLUE) U4.14(OUT16)
N02928: DS9.2(RED) U4.15(OUT17)
N02934: DS9.3(GREEN) U4.16(OUT18)
N03097: C12.1 C13.1 L3.2 U3.11(VDD_PA)
N03359: DS10.1(BLUE) U4.18(OUT19)
N03365: DS10.2(RED) U4.19(OUT20)
N03371: DS10.3(GREEN) U4.20(OUT21)
N03382: C38.1 U7.28(XTAL_IN) Y4.1
N03395: C39.1 U7.27(XTAL_OUT) Y4.3
N03481: DS11.1(BLUE) U4.21(OUT22)
N03487: DS11.2(RED) U4.22(OUT23)
N03493: DS11.3(GREEN) U4.23(OUT24)
N03631: DS12.1(BLUE) U4.24(OUT25)
N03637: DS12.2(RED) U4.25(OUT26)
N03643: DS12.3(GREEN) U4.26(OUT27)
N03677: L2.1 L3.1 U3.12(ANT1)
N03692: L1.1 L2.2 U3.13(ANT2)
N03711: C10.1 L1.2
N03715: AE1.1(IN) C10.2 C11.1
N03833: DS15.1(BLUE) U4.27(OUT28)
N03839: DS15.2(RED) U4.28(OUT29)
N03845: DS15.3(GREEN) U4.29(OUT30)
N03893: DS14.1(BLUE) U4.30(OUT31)
N03895: DS14.2(RED) U4.31(OUT32)
N03897: DS14.3(GREEN) U4.32(OUT33)
N03935: DS13.1(BLUE) U4.33(OUT34)
N03941: DS13.2(RED) U4.34(OUT35)
N03947: DS13.3(GREEN) U4.35(OUT36)
N04099: R24.2 U7.13(MTDO)
N04101: R23.2 U7.12(MTCK)
N05845: DS4.3(GREEN) U4.1(OUT3)
N05857: DS4.2(RED) U4.44(OUT2)
N05869: DS4.1(BLUE) U4.43(OUT1)
N05962: C37.1 L6.2 U7.2(LNA)
N05976: AE2.1(IN) C37.2 L7.2
N06603: U5.29(EXTAL32) Y3.2
N06615: U5.28(XTAL32) Y3.1
N08855: C3.1 D1.1(C) R1.2 U1.1(CHG_IN)
N08912: D1.2(A) J1.1
N0016014: R27.2 U7.31(RES12K)
N18669: C19.1 C20.1 L4.1 U5.22(VDDA) U5.23(VREFH)
N33119: DS2.2(A) R2.1
N33141: DS3.2(A) R3.1
N33179: DS1.2(A) R1.1
N58949: D2.2(A) R33.2
N59151: R32.1 SW1.1
N69311: C40.1 D2.1(C) R31.1 TP23.1 U6.7(UVLO)
N100511: R28.1 R29.2 R30.2

Pads without a net: AE1 2; AE2 2; J7 7; U2 7 19 21; U7 6 9 10

## Via types
v1: diameter 0.61, hole 0.305, TOP to BOTTOM, 630 vias

## Routing (per net, layer and track width the routed paths; a pad name or vN(x,y) marks a point on that pad's centre or on a via; arc(x,y) is an arc through that point)
GND: length 249.4
  TOP w0.152: 34.26,23.78 34.21,23.78 34.09,23.9 U5.60 ; 31.72,12.22 31.71,12.23 U2.5 30.67,12.23 30.66,12.24 ; 30.68,13.31 30.79,13.43 U2.2 31.61,13.43 31.62,13.41 ; v1(14,37.6) 14.68,38.28 R30.1 ; U5.88 25.4,34.16 25.57,34.33 C23.2 ; C8.2 37.46,48.03 37.46,48.03 U3.17 37.46,47.14 ; v1(43.71,5.97) 44.51,6.77 U4.37 ; v1(43.71,5.97) U4.17 ; v1(43.71,5.97) U4.39 43.71,9.09 43.34,9.47 C17.2 C18.2 43.34,11.86 43.47,11.99 v1(43.48,11.99) ; 30.66,13.08 30.71,13.03 U2.3 31.62,13.03 31.65,13.06 ; 34.29,44.19 35.31,44.19 35.33,44.17 35.69,44.53 36.65,44.53 36.96,44.22 U3.8 ; C4.2 34.33,12.57 34.27,12.63 U2.15 33.4,12.63 33.32,12.55 ; U2.20 33.09,13.75 33.1,13.74 ; 37.46,47.14 37.05,46.74 36.36,46.74 35.96,47.14 U3.20 ; 37.46,47.14 38.3,46.3 U3.14 ; v1(42.36,11.93) 42.38,11.91 42.38,11.79 42.42,11.76 R15.1 ; v1(27.05,15.16) 27.05,15.94 C24.2 27.02,16.59 26.9,16.71 U5.41 ; C14.2 34.16,40.51 34.16,41.15 v1(34.39,41.38) 34.39,41.78 34.54,41.93 Y1.4 ; L7.1 6.66,7.16 5.84,7.16 v1(5.46,6.78) ; 30.89,18.77 30.9,18.76 U5.49 30.9,16.69 31.01,16.59 31.01,16.54 ; Y2.2 32.22,16.03 31.98,16.03 31.8,15.85 v1(31.7,15.85) ; 31.67,11.89 31.63,11.84 31.29,11.84 31.27,11.83 U2.6 30.82,11.83 30.68,11.96 ; Z1.2 16.94,41.11 17.26,41.43 v1(17.65,41.43) ; 16.54,19.74 16.69,19.9 U5.24 18.81,19.9 18.82,19.91 ; 33.22,13.03 33.23,13.03 U2.16 34.46,13.03 34.47,13.03 ; 32.28,12.01 32.29,12.01 U2.9 32.29,10.48 C5.2 32.49,10.28 v1(32.49,9.45) ; R14.1 45.01,11.91 45,11.92 v1(45,11.99) ; v1(41.02,39.73) 40.79,39.73 40.79,39.73 Y1.2 ; 33.4,13.81 33.68,13.81 33.7,13.83 U2.18 34.27,13.83 34.27,13.79 34.34,13.79 34.39,13.74 ; 30.66,12.62 30.66,12.63 U2.4 31.62,12.63 31.62,12.62 ; 34.37,12.22 34.36,12.23 U2.14 33.44,12.23 33.38,12.17 ; 15.91,27.24 C21.2 16.14,27.4 U5.9 ; v1(1.17,39.19) 1.4,39.42 2.16,39.42 2.24,39.51 U6.9 ; 42.88,16.56 42.81,16.63 R18.1 ; U5.74 33.97,30.9 34.13,30.74 C25.2 35.63,30.74 35.64,30.73 ; C15.2 v1(41.15,40.49) ; 33.48,13.44 33.49,13.43 U2.17 34.46,13.43 34.47,13.44 ; 34.84,23.78 C26.2
  TOP w0.381: 15.49,26.82 15.91,27.24 ; 35.31,23.32 34.84,23.78
  TOP w0.406: 43.79,45.37 C11.2 ; C11.2 44.91,45.37 ; C11.2 44.35,44.94 ; 31.01,16.54 C22.2 31.44,15.98 ; 45.16,5.97 v1(43.71,5.97) 42.27,5.97 ; 24.33,49.4 J4.8 ; J4.8 25.4,48.34 ; J4.8 26.47,49.4 ; 16.54,19.74 C19.2 15.98,19.31 ; 14.53,6.33 C36.2 15.09,5.9 ; J5.9 2.46,22.86 ; J5.9 1.4,23.93 ; J5.9 1.4,21.79 ; J6.9 49.4,29.01 ; J6.9 49.4,26.87 ; J6.9 48.34,27.94 ; C34.2 18.01,7.47 ; C34.2 17.35,6.78 ; C34.2 18.67,6.78 ; C34.2 18.01,6.1 ; J3.9 29.01,1.4 ; J3.9 26.87,1.4 ; J3.9 27.94,2.46 ; 4.07,7.19 C35.2 3.64,7.75 ; J6.7 49.4,23.93 ; J6.7 48.34,22.86 ; J6.7 49.4,21.79 ; 46.73,19.68 J7.9 ; J7.9 48.3,20.24 ; J7.9 49.88,19.68 ; 13.35,31.4 DS16.1 13.35,32.08 ; 10.03,8.18 L6.1 9.94,7.48 ; 39.01,48.54 R13.1 ; R13.1 39.01,49.66 ; R13.1 39.44,49.1 ; 35.31,23.32 C27.2 ; C27.2 35.99,23.98 ; C27.2 35.99,22.5 ; C27.2 36.68,23.32 ; 16.54,27.24 C21.2 15.98,26.8 ; 33.91,48.16 C9.2 ; C9.2 33.22,48.82 ; C9.2 33.91,49.48 ; C9.2 34.6,48.82 ; C20.2 15.49,19.3 ; C20.2 14.12,19.3 ; C20.2 14.81,18.64 ; C20.2 14.81,19.96 ; DS1.1 14.13,32.87 ; DS1.1 13.45,32.18 ; DS1.1 14.13,32.18 ; Y1.2 39.58,40.52 ; Y1.2 39.58,38.94 ; Y1.2 38.4,39.73 ; 38.57,32.14 Q1.2 ; Q1.2 39.71,32.14 ; Q1.2 39.14,32.77 ; 42.92,45.06 C12.2 43.35,44.5 ; 12.19,6.33 R23.1 12.75,5.9 ; 48.3,16.59 J7.5 ; J7.5 46.73,17.14 ; J7.5 49.88,17.14 ; 34.75,49.1 C16.2 ; C16.2 35.19,48.54 ; C16.2 35.19,49.66 ; 24.33,1.4 J3.8 ; J3.8 25.4,2.46 ; J3.8 26.47,1.4 ; 16.77,19.4 U5.25 18.53,19.4 ; J6.8 49.4,26.47 ; J6.8 48.34,25.4 ; J6.8 49.4,24.33 ; 34.82,23.35 C26.2 34.26,23.78 ; J7.3 49.88,15.87 ; J7.3 48.3,16.43 ; J7.3 46.73,15.87 ; 6.18,10.16 R27.1 6.61,10.72 ; 26.87,49.4 J4.7 ; J4.7 27.94,48.34 ; J4.7 29.01,49.4 ; 2.9,8.89 C33.2 ; C33.2 3.56,9.58 ; C33.2 3.56,8.2 ; C33.2 4.22,8.89 ; 3.89,17.27 C39.2 3.46,17.83 ; 9.4,36.4 R34.1 9.84,36.96 ; J5.7 1.4,29.01 ; J5.7 1.4,26.87 ; J5.7 2.46,27.94 ; 18.52,8.22 U8.4 ; U8.4 18.97,9.09 ; U8.4 18.06,9.09 ; U8.4 18.52,9.97 ; 34.04,44.62 C7.2 33.48,44.19 ; 4.91,14.42 Y4.2 ; Y4.2 4.12,15.6 ; Y4.2 5.7,15.6 ; Y4.2 4.91,16.79 ; 14.12,26.82 C28.2 ; C28.2 14.81,27.48 ; C28.2 14.81,26.16 ; C28.2 15.49,26.82 ; 43.35,43.48 C13.2 42.92,42.93 ; 21.79,1.4 J3.7 ; J3.7 22.86,2.46 ; J3.7 23.93,1.4 ; J4.9 23.93,49.4 ; J4.9 22.86,48.34 ; J4.9 21.79,49.4 ; C6.2 33.86,9.73 ; C6.2 32.74,9.73 ; C6.2 33.3,9.3 ; J5.8 2.46,25.4 ; J5.8 1.4,26.47 ; J5.8 1.4,24.33 ; 13.77,5.9 R24.1 14.33,6.33 ; 2.71,10.72 Y4.4 ; Y4.4 3.5,11.9 ; Y4.4 2.71,13.09 ; Y4.4 1.92,11.9 ; 25.57,35.38 C23.2 26,34.82 ; 4.16,9.68 C38.2 3.73,10.24
  GND w0.406: 24.33,1.4 J3.8 ; J3.8 25.4,2.46 ; J3.8 26.47,1.4 ; J5.7 2.46,27.94 ; J5.7 1.4,26.87 ; J5.7 1.4,29.01 ; 26.87,1.4 J3.9 ; J3.9 27.94,2.46 ; J3.9 29.01,1.4 ; J3.7 22.86,2.46 ; J3.7 21.79,1.4 ; J3.7 23.93,1.4 ; J4.9 23.93,49.4 ; J4.9 21.79,49.4 ; J4.9 22.86,48.34 ; 25.4,48.34 J4.8 ; J4.8 24.33,49.4 ; J4.8 26.47,49.4 ; J5.8 1.4,26.47 ; J5.8 2.46,25.4 ; J5.8 1.4,24.33 ; 26.87,49.4 J4.7 ; J4.7 27.94,48.34 ; J4.7 29.01,49.4 ; 49.4,26.87 J6.9 ; J6.9 48.34,27.94 ; J6.9 49.4,29.01 ; J6.7 49.4,23.93 ; J6.7 48.34,22.86 ; J6.7 49.4,21.79 ; 48.34,25.4 J6.8 ; J6.8 49.4,26.47 ; J6.8 49.4,24.33 ; 1.4,21.79 J5.9 ; J5.9 1.4,23.93 ; J5.9 2.46,22.86
  BOTTOM w0.406: J3.9 29.01,1.4 ; J3.9 27.94,2.46 ; J3.9 26.87,1.4 ; J5.8 2.46,25.4 ; J5.8 1.4,24.33 ; J5.8 1.4,26.47 ; J6.9 49.4,29.01 ; J6.9 49.4,26.87 ; J6.9 48.34,27.94 ; 26.47,49.4 J4.8 24.33,49.4 ; 1.4,21.79 J5.9 ; J5.9 2.46,22.86 ; J5.9 1.4,23.93 ; J6.7 49.4,23.93 ; J6.7 48.34,22.86 ; J6.7 49.4,21.79 ; J5.7 2.46,27.94 ; J5.7 1.4,26.87 ; J5.7 1.4,29.01 ; J4.7 29.01,49.4 ; J4.7 26.87,49.4 ; J4.7 27.94,48.34 ; 21.79,49.4 J4.9 23.93,49.4 ; J3.8 25.4,2.46 ; J3.8 26.47,1.4 ; J3.8 24.33,1.4 ; J6.8 49.4,26.47 ; J6.8 48.34,25.4 ; J6.8 49.4,24.33 ; 21.79,1.4 J3.7 ; J3.7 23.93,1.4 ; J3.7 22.86,2.46
  vias: v1(0.89,18.21) v1(0.89,17.45) v1(0.89,16.69) v1(0.89,15.93) v1(0.89,15.16) v1(0.89,14.4) v1(0.89,13.64) v1(0.89,12.88) v1(0.89,12.12) v1(0.89,11.35) v1(0.89,10.59) v1(0.89,9.83) v1(0.89,9.07) v1(0.89,8.31) v1(0.89,7.54) v1(0.89,6.78) v1(0.89,6.02) v1(1.32,41.83) v1(1.27,18.97) v1(1.65,18.21) v1(1.65,17.07) v1(1.65,14.02) v1(1.65,13.26) v1(1.65,12.5) v1(1.65,11.73) v1(1.65,10.97) v1(1.65,10.21) v1(1.65,9.45) v1(1.65,8.69) v1(1.65,7.92) v1(1.65,6.78) v1(2.03,18.97) v1(2.44,37.97) v1(2.41,18.21) v1(2.41,6.78) v1(2.41,5.46) v1(2.51,36.65) v1(2.51,35.89) v1(2.51,35.13) v1(2.79,18.97) v1(2.79,13.72) v1(3.17,18.21) v1(3.17,6.78) v1(3.17,5.46) v1(3.61,33.45) v1(3.56,18.97) v1(3.84,15.65) v1(3.78,11.89) v1(3.94,18.21) v1(3.94,6.78) v1(3.94,5.46) v1(4.04,30.02) v1(4.32,18.97) v1(4.32,17.27) v1(4.37,33.45) v1(4.7,18.21) v1(4.7,6.78) v1(4.7,5.46) v1(4.9,14.15) v1(5.13,33.45) v1(5.08,17.45) v1(5.46,18.21) v1(5.46,5.46) v1(5.84,18.97) v1(5.84,17.45) v1(5.8,10.16) v1(5.89,33.45) v1(6.22,18.21) v1(6.22,5.46) v1(6.58,17.45) v1(6.6,4.83) v1(6.6,4.06) v1(6.6,3.3) v1(6.6,2.54) v1(6.6,1.78) v1(6.6,1.02) v1(6.81,12.95) v1(6.98,5.46) v1(7.37,4.7) v1(7.39,0.99) v1(7.75,5.46) v1(7.95,17.2) v1(8.13,4.7) v1(8.33,17.96) v1(8.51,5.46) v1(8.71,17.2) v1(8.89,4.7) v1(9.09,17.96) v1(9.27,5.46) v1(9.45,17.2) v1(9.47,48.06) v1(9.47,18.72) v1(9.68,32.69) v1(9.65,4.7) v1(9.83,17.96) v1(9.93,0.99) v1(10.03,5.46) v1(10.21,18.72) v1(10.19,17.2) v1(10.41,4.7) v1(10.49,11.66) v1(10.59,7.54) v1(10.79,5.46) v1(11.18,4.7) v1(11.25,34.26) v1(11.56,5.46) v1(11.94,4.7) v1(11.99,37.49) v1(12.32,5.46) v1(12.7,4.7) v1(12.93,49.3) v1(13.14,17.2) v1(13.08,5.46) v1(13.26,9.12) v1(13.36,22.2) v1(13.54,27.89) v1(13.49,24.36) v1(13.46,4.7) v1(13.74,0.99) v1(13.84,5.46) v1(13.88,17.2) v1(14.22,4.7) v1(14.26,17.96) v1(14.3,7.87) v1(14.62,17.2) v1(14.6,5.46) v1(15.02,17.96) v1(14.99,4.7) v1(15.32,10.79) v1(15.37,34.9) v1(15.35,17.2) v1(15.37,5.46) v1(15.47,49.3) v1(15.75,4.7) v1(15.77,24.36) v1(15.77,22.12) v1(16.01,16.83) v1(16.1,12.8) v1(16.13,5.46) v1(16.51,4.7) v1(16.64,16.41) v1(16.66,10.26) v1(16.89,5.46) v1(17.17,12.85) v1(17.27,4.7) v1(17.65,5.46) v1(18.03,4.7) v1(18.07,16.17) v1(18.41,5.46) v1(18.71,15.79) v1(18.85,36.14) v1(18.8,12.7) v1(18.8,11.94) v1(18.8,11.18) v1(18.8,10.41) v1(18.8,4.7) v1(19.02,28.45) v1(19.05,15.14) v1(19.18,7.75) v1(19.18,6.98) v1(19.18,6.22) v1(19.18,5.46) v1(19.28,49.3) v1(19.46,0.99) v1(19.56,14.6) v1(19.56,13.84) v1(19.56,13.08) v1(19.56,12.32) v1(19.56,11.56) v1(19.56,10.79) v1(19.56,10.03) v1(19.56,9.27) v1(19.56,8.51) v1(19.56,4.7) v1(19.94,7.37) v1(19.94,6.6) v1(19.94,5.84) v1(20.09,23.85) v1(20.32,8.89) v1(20.32,8.13) v1(20.83,46.46) v1(20.75,11.02) v1(20.93,13.08) v1(20.98,28.88) v1(21.46,20.24) v1(21.49,5.13) v1(21.79,14.55) v1(21.95,37.21) v1(23.24,20.37) v1(24.13,5.05) v1(24.16,46.23) v1(24.46,15.67) v1(24.51,12.67) v1(24.61,28.85) v1(24.64,23.85) v1(25.45,19.41) v1(26.06,45.57) v1(26.29,34.34) v1(26.59,5.05) v1(28.17,16.1) v1(28.75,38.18) v1(28.88,45.57) v1(30.3,12.65) v1(30.78,49.99) v1(30.78,49.23) v1(30.78,48.46) v1(30.78,47.7) v1(30.78,46.94) v1(31.24,23.62) v1(31.55,49.61) v1(31.55,48.84) v1(31.55,48.08) v1(31.55,47.32) v1(31.47,28.7) v1(31.98,19.84) v1(32.31,49.99) v1(32.31,49.23) v1(32.31,48.46) v1(32.31,47.7) v1(32.31,46.94) v1(32.31,43.84) v1(32.31,43.08) v1(32.31,42.32) v1(32.31,41.55) v1(32.31,40.79) v1(32.31,40.03) v1(32.31,39.27) v1(32.77,38.63) v1(33.05,40.41) v1(33.05,39.65) v1(33.07,49.99) v1(33.07,44.22) v1(33.07,43.46) v1(33.07,42.7) v1(33.07,41.94) v1(33.07,41.17) v1(33.83,49.99) v1(33.86,38.63) v1(34.24,37.87) v1(34.38,15.57) v1(34.59,49.99) v1(34.62,38.63) v1(34.77,26.82) v1(35,37.87) v1(35.05,32.33) v1(35.36,49.99) v1(35.38,38.63) v1(35.76,37.87) v1(35.81,32.33) v1(36.12,49.99) v1(36.14,38.63) v1(36.17,40.84) v1(36.2,20.19) v1(36.53,37.87) v1(36.88,49.99) v1(36.93,45.72) v1(36.91,38.63) v1(37.16,33.91) v1(37.29,37.87) v1(37.64,49.99) v1(37.64,39.67) v1(37.67,38.63) v1(38,41.17) v1(38.25,31.27) v1(38.4,49.99) v1(38.43,38.63) v1(39.04,43.69) v1(39.07,35.71) v1(39.09,33.2) v1(39.17,49.99) v1(39.22,40.82) v1(39.19,38.63) v1(39.65,29.72) v1(39.93,49.99) v1(39.95,38.63) v1(40.31,49.23) v1(40.34,37.87) v1(40.69,49.99) v1(40.72,38.63) v1(40.72,37.11) v1(40.72,30.07) v1(41.07,49.23) v1(41.1,37.87) v1(41.45,49.99) v1(41.48,38.63) v1(41.48,37.11) v1(41.73,48.21) v1(41.83,49.23) v1(41.86,37.87) v1(42.21,49.99) v1(42.24,38.63) v1(42.24,37.11) v1(42.62,37.87) v1(42.93,48.72) v1(42.93,47.96) v1(42.98,49.99) v1(43,38.63) v1(43,37.11) v1(43.38,37.87) v1(43.59,29.9) v1(43.74,49.99) v1(43.69,49.1) v1(43.69,48.34) v1(43.69,47.57) v1(43.71,34.98) v1(43.71,32.44) v1(43.76,38.63) v1(43.76,37.11) v1(44.15,42.55) v1(44.15,40) v1(44.15,37.87) v1(44.5,49.99) v1(44.53,38.63) v1(44.53,37.11) v1(44.86,39.32) v1(44.91,37.87) v1(45.26,49.99) v1(45.26,48.46) v1(45.26,47.7) v1(45.26,46.94) v1(45.26,46.18) v1(45.26,45.42) v1(45.26,44.65) v1(45.26,43.89) v1(45.26,43.13) v1(45.26,42.37) v1(45.26,41.61) v1(45.26,40.84) v1(45.26,40.08) v1(45.29,38.63) v1(45.29,37.11) v1(45.49,26.75) v1(45.49,24.13) v1(45.67,37.87) v1(46.02,43.89) v1(46.02,42.75) v1(46.02,41.99) v1(46.02,41.22) v1(46.02,40.46) v1(46.02,39.7) v1(46.05,38.63) v1(46.05,37.11) v1(46.25,34.98) v1(46.25,32.44) v1(46.43,37.87) v1(46.35,19.05) v1(46.38,16.54) v1(46.79,43.89) v1(46.79,43.13) v1(46.79,42.37) v1(46.79,41.61) v1(46.79,40.84) v1(46.79,40.08) v1(46.81,38.63) v1(46.81,37.11) v1(47.14,21.18) v1(47.19,37.87) v1(47.55,43.89) v1(47.57,38.63) v1(47.57,37.11) v1(47.96,37.87) v1(48.31,43.89) v1(48.34,38.63) v1(48.34,37.11) v1(48.72,37.87) v1(49.07,43.89) v1(49.1,38.63) v1(49.1,37.11) v1(49.48,37.87) v1(49.71,42.39) v1(49.83,43.89) v1(49.76,4.27) v1(49.86,38.63) v1(49.86,37.11)
GND_EARTH: length 19.5
  TOP w0.152: v1(3.91,40) 4.42,39.5 ; R6.1 R5.1
  TOP w0.254: C40.2 2.43,33.25 3.88,34.7 C29.2
  TOP w0.406: J2.2 15.03,44.8 ; J2.2 14.21,43.98 ; J2.2 15.03,43.17 ; 11.79,42.04 W3.1 10.62,42.04 ; 3.63,46.96 J1.2 ; J1.2 4.42,47.75 ; J1.2 4.42,46.18 ; J1.2 5.21,46.96
  GND w0.406: J1.2 5.21,46.96 ; J1.2 4.42,47.75 ; J1.2 3.63,46.96 ; J1.2 4.42,46.18 ; 11.2,41.45 W3.1 ; W3.1 10.62,42.04 ; W3.1 11.79,42.04 ; 14.21,43.98 J2.2 ; J2.2 15.03,44.8 ; J2.2 15.03,43.17 ; J2.2 15.84,43.98
  vias: v1(1.32,44.12) v1(1.32,43.36) v1(1.32,42.6) v1(2.08,44.12) v1(2.84,44.12) v1(3.45,40.92) v1(3.45,39.09) v1(3.61,44.12) v1(4.37,44.12) v1(4.37,40.92) v1(4.37,39.09) v1(5.13,44.12) v1(5.89,44.12) v1(6.65,43.36) v1(7.42,42.6) v1(8.18,42.6) v1(8.18,37.26) v1(8.18,36.5) v1(8.94,42.6) v1(8.94,37.26) v1(9.7,37.26) v1(10.46,39.55) v1(10.46,38.79) v1(10.46,38.02) v1(10.46,37.26) v1(11.23,39.55) v1(11.99,39.55) v1(12.75,39.55) v1(13.51,39.55)
VBAT: length 10.4
  TOP w0.152: v1(1.57,39.95) 1.63,40 U6.8 ; U6.6 1.79,41 1.73,41.07 v1(1.59,41.07) ; U1.10 10.53,44.19 10.59,44.25 C1.1
  TOP w0.305: 16.21,43.98 J2.1 ; J2.1 17.03,44.8 ; J2.1 17.03,43.17 ; J2.1 17.84,43.98
  TOP w0.508: C1.1 v1(12.19,44.25)
  PWR w0.406: J2.1 17.03,44.8 ; J2.1 17.84,43.98 ; J2.1 16.21,43.98 ; J2.1 17.03,43.17
  vias: v1(5.44,41.53) v1(6.2,42.29) v1(6.2,41.53)
VBAT_ADC: length 18
  TOP w0.152: v1(19.76,29.79) 19.76,26.08 18.58,24.9 U5.14 ; Z1.1 15.87,38.33 R29.1 15.85,38 v1(15.32,37.46)
  BOTTOM w0.152: v1(19.76,29.79) 19.35,30.2 19.35,31.67 16.74,34.29 16.74,34.67 16.74,36.04 v1(15.32,37.46)
VCC: length 155.1
  TOP w0.152: v1(34.92,47.62) 34.92,47.32 34.65,47.04 C9.1 ; U6.10 1.79,39.01 1.57,38.79 v1(1.57,38.25) ; v1(38.43,37.87) 38.58,37.87 38.59,37.87 R7.2 ; U5.30 21.4,18.68 20.7,19.38 v1(20.7,19.92) ; DS14.4 42.74,24.83 43.43,24.13 v1(43.74,24.13) ; v1(5.26,26.67) 7.37,26.67 8.06,25.97 DS8.4 ; v1(13.67,13.97) 13.16,13.97 13.15,13.96 U7.17 ; v1(30.44,13.83) U2.1 31.27,13.83 31.29,13.81 32.08,13.81 32.22,13.94 32.22,14.07 32.29,14.14 U2.22 ; R10.2 41.51,14.02 41.68,13.85 R19.1 v1(42.29,13.16) ; v1(5.51,7.95) 5.44,7.95 5.13,7.65 4.92,7.65 C35.1 4.82,8.38 C33.1 6.36,8.89 R25.2 6.61,8.85 6.3,8.53 v1(6.3,8.33) ; v1(43.54,21.72) 43.31,21.72 42.74,22.29 DS13.4 ; v1(35.69,31.49) C25.1 34.17,31.49 34.08,31.4 U5.75 ; v1(24.13,7.06) 24.13,8.17 24.28,8.32 DS11.4 ; J7.1 48.3,14.02 48.58,13.74 v1(49.25,13.74) ; U2.13 34.36,11.83 34.37,11.82 C4.1 35.61,11.82 36.09,12.3 v1(36.09,12.83) 36.09,13.98 R11.2 ; U5.48 30.4,16.12 C22.1 29.9,15.98 29.69,15.77 v1(29.57,15.77) ; U2.8 31.82,11.36 31.82,10.73 31.65,10.57 C5.1 31.65,9.5 v1(31.72,9.43) ; C34.1 v1(16.23,7.85) ; DS5.4 25.97,43.04 v1(26.67,43.74) ; U7.30 7.33,10.91 v1(7.24,11) 7.65,11.41 U7.29 ; v1(39.42,47.04) 39.18,46.8 U3.15 ; U7.11 13.42,10.91 v1(13.45,10.88) ; DS10.4 26.82,8.32 26.67,8.17 v1(26.67,7.06) ; R17.1 42.82,17.66 42.91,17.75 46.3,17.75 v1(46.33,17.78) ; Y2.4 33.54,15 33.44,14.89 v1(33.14,14.89) ; v1(21.59,7.06) 21.59,8.17 21.74,8.32 DS12.4 ; v1(8.36,8.89) 8.36,8.9 8.74,9.28 U7.1 ; C36.1 v1(15.09,7.87) ; v1(13.87,28.6) C28.1 15.42,27.98 C21.1 16.59,27.98 16.67,27.9 U5.8 ; DS7.4 8.06,28.51 7.37,29.21 v1(5.64,29.21) ; v1(35.64,26.21) 35.99,25.86 C27.1 35.43,24.53 C26.1 34.21,24.53 34.08,24.4 U5.61 ; v1(29.15,43.73) 28.51,43.1 DS4.4 ; v1(5.26,24.13) 7.37,24.13 8.06,23.43 DS9.4 ; C8.1 36.7,49.09 v1(36.7,48.29) 36.7,48.26 36.96,48 U3.18 ; R16.1 44.14,20.44 44.32,20.62 v1(44.98,20.62) ; v1(26.26,15.16) 26.26,15.49 26.27,15.5 C24.1 26.27,16.59 26.4,16.72 U5.40 ; U8.8 14.71,13.6 v1(15.34,12.97) ; v1(24.94,35.64) 24.94,35.56 24.82,35.44 C23.1 24.82,34.21 24.9,34.14 U5.89 ; C7.1 34.49,43.44 34.49,43.43 v1(34.85,43.43) ; v1(24.13,43.74) 23.43,43.04 DS6.4 ; U3.7 36.46,43.31 36.25,43.1 v1(36.25,43) ; v1(43.74,26.67) 43.43,26.67 42.74,27.37 DS15.4 ; U7.3 U7.4 10.24,9.12 v1(10.69,8.67) ; U4.38 44.11,8.7 44.09,8.73 C17.1 C18.1 44.09,11.78 v1(44.24,11.94)
  TOP w0.254: v1(10.54,19.49) 10.54,19.74 10.55,19.75 L4.2
  TOP w0.381: v1(5.64,29.21) 6.33,29.9 R3.2 R2.2 R21.2
  TOP w0.386: LS1.2 v1(47.42,34.16)
  PWR w0.406: J4.5 25.4,47.93 ; J4.5 26.47,46.86 ; J4.5 25.4,45.8 ; 2.87,27.94 J5.4 ; J5.4 5,27.94 ; J5.4 3.94,29.01 ; J5.4 3.94,26.87 ; 22.86,45.8 J4.6 ; J4.6 21.79,46.86 ; J4.6 22.86,47.93 ; J4.6 23.93,46.86 ; J4.4 29.01,46.86 ; J4.4 27.94,47.93 ; J4.4 27.94,45.8 ; J4.4 26.87,46.86 ; 24.33,3.94 J3.5 ; J3.5 25.4,5 ; J3.5 26.47,3.94 ; J3.5 25.4,2.87 ; 45.8,25.4 J6.5 ; J6.5 47.93,25.4 ; J6.5 46.86,24.33 ; J6.5 46.86,26.47 ; 46.86,21.79 J6.4 ; J6.4 45.8,22.86 ; J6.4 47.93,22.86 ; J6.4 46.86,23.93 ; 45.8,27.94 J6.6 ; J6.6 47.93,27.94 ; J6.6 46.86,26.87 ; J6.6 46.86,29.01 ; J3.4 22.86,5 ; J3.4 23.93,3.94 ; J3.4 21.79,3.94 ; J3.4 22.86,2.87 ; 3.94,21.79 J5.6 ; J5.6 3.94,23.93 ; J5.6 5,22.86 ; J5.6 2.87,22.86 ; 3.94,24.33 J5.5 ; J5.5 5,25.4 ; J5.5 3.94,26.47 ; J5.5 2.87,25.4 ; J3.6 27.94,5 ; J3.6 29.01,3.94 ; J3.6 26.87,3.94 ; J3.6 27.94,2.87
  BOTTOM w0.152: v1(1.57,38.25) 1.57,37.72 1.96,37.34 v1(6.91,37.34)
  vias: v1(6.91,36.58) v1(6.91,35.81) v1(6.91,35.05) v1(6.91,34.29)
#CS: length 14.5
  TOP w0.152: U7.20 10.74,14.58 11.02,14.86 11.4,14.86 12.26,15.71 15.08,15.71 15.84,14.95 16.47,14.95 16.64,14.78 16.64,11.99 16.13,11.48 14.98,11.48 14.71,11.2 U8.1
#HOLD: length 5.7
  TOP w0.152: U7.18 11.74,14.33 12.04,14.63 v1(13.07,14.63) ; U8.7 15.49,14.02 15.24,14.27 15.24,14.78 15.22,14.8 15.22,14.82 v1(14.86,15.18)
  BOTTOM w0.152: v1(13.07,14.63) 14.31,14.63 v1(14.86,15.18)
#RST: length 16.6
  TOP w0.152: U5.52 34.08,19.9 34.42,19.56 34.42,18.44 35.25,17.61 35.63,17.61 36.37,16.87 37.06,16.87 37.77,16.15 38.66,16.15 38.97,15.85 40.66,15.85 41,16.18 41,17.17 41.22,17.4 41.22,18.38 41.35,18.51 41.35,18.88 42.16,19.69 R16.2 42.3,19.68 J7.10
#WP: length 11.5
  TOP w0.152: U8.3 17.25,10.67 v1(16.87,11.04) ; v1(15.9,12.01) 15.37,12.01 14.83,12.55 14.83,12.74 14.52,13.06 14.35,13.06 14.2,13.21 14.2,15.01 13.81,15.41 12.38,15.41 11.24,14.27 U7.19
  BOTTOM w0.152: v1(16.87,11.04) v1(15.9,12.01)
BUTTONOUT: length 12.1
  TOP w0.152: R34.2 R33.1 13.09,35.36 SW1.2 15.42,33.03 15.42,30.5 16.52,29.4 U5.5
BUZZER_LINE: length 9.2
  TOP w0.152: U5.72 36.35,29.9 36.5,30.05 36.5,34.75 36.91,35.15 R8.1
BUZZER_SWITCH: length 4.8
  TOP w0.152: R9.1 37.26,29.88 36.79,29.4 U5.71
CLK: length 7.9
  TOP w0.152: U8.6 17.25,15.11 17.09,15.27 15.96,15.27 15.21,16.01 12.02,16.01 11.47,15.47 R26.2
DAC_OUT: length 19
  TOP w0.152: U5.27 19.9,18.4 19.69,18.62 19.19,18.62 18.77,18.19 18.77,16.79 v1(19.14,16.42)
  BOTTOM w0.152: v1(19.14,16.42) 21.36,14.2 21.36,13.4 21.46,13.3 21.46,12.86 21.29,12.68 21.29,8.08 20.93,7.72 20.93,4.67 19.94,3.68 W1.1
DI: length 13.1
  TOP w0.152: U7.23 9.24,15.86 10.01,16.62 15.46,16.62 16.21,15.87 17.59,15.87 18.52,14.95 U8.5
DO: length 17.4
  TOP w0.152: U8.2 15.98,10.9 17.84,12.76 17.84,14.95 17.22,15.57 16.08,15.57 15.33,16.32 10.14,16.32 9.74,15.93 U7.22
EN_B: length 40
  TOP w0.152: v1(28.1,32.02) 28.07,32.04 28.07,32.3 27.9,32.48 U5.83 ; v1(19.68,39.75) TP19.1 ; U1.4 v1(8.54,47.9)
  BOTTOM w0.152: 19.69,39.75 v1(19.68,39.75) ; 19.69,39.75 20.08,39.75 20.55,39.28 20.55,38.8 20.24,38.49 19.07,38.49 17.96,37.37 17.96,34.8 21.4,31.35 25.5,31.35 25.73,31.58 26.25,31.58 26.48,31.8 26.96,31.8 27.19,32.03 27.55,32.03 27.56,32.02 v1(28.1,32.02) ; 19.69,39.75 19.66,39.75 19.26,40.15 19.26,40.88 19.18,40.97 19.18,45.29 17.65,46.81 17.4,46.81 17.14,46.81 17.12,46.79 8.97,46.79 8.54,47.21 v1(8.54,47.9)
FSYNC: length 17.7
  TOP w0.152: v1(26.37,13.92) 25.55,14.73 25.55,16.38 25.9,16.72 U5.39 ; TP3.1 35.15,9.35 v1(34.16,10.34) 34.16,10.64 33.8,11.01 33.29,11.01 33.16,11.14 33.16,11.36 U2.11
  BOTTOM w0.152: v1(34.16,10.34) 33.53,10.97 28.78,10.97 26.37,13.39 v1(26.37,13.92)
GPIO1: length 15.4
  TOP w0.152: U5.69 34.19,28.4 34.89,29.1 37.05,29.1 39.4,31.44 43.32,31.44 44.32,30.44 J6.3
GPIO2: length 17.5
  TOP w0.152: v1(42.23,30.76) 41.85,31.14 39.52,31.14 37.17,28.79 35.14,28.79 34.25,27.9 U5.68
  BOTTOM w0.152: J6.2 43.21,25.4 43.05,25.55 43.05,29.94 v1(42.23,30.76)
GPIO3: length 19.3
  TOP w0.152: v1(41.61,30.33) 41.1,30.84 39.65,30.84 37.3,28.49 35.27,28.49 34.18,27.4 U5.67
  BOTTOM w0.152: J6.1 43.31,22.86 43.15,23.01 43.15,25.02 42.75,25.43 42.75,29.18 v1(41.61,30.33)
GPIO4: length 26.1
  TOP w0.152: U5.53 31.77,20.4 30.83,21.34 30.83,22.03 29.67,23.19 v1(28.3,23.19)
  BOTTOM w0.152: v1(28.3,23.19) 28.3,22.66 28.07,22.43 28.07,19.51 25.7,17.15 25.7,8.03 26.14,7.59 27.79,7.59 27.94,7.44 J3.3
GPIO5: length 25.6
  TOP w0.152: v1(27.38,24.38) 29.54,24.38 31.56,26.4 U5.65
  BOTTOM w0.152: v1(27.38,24.38) 27.76,24 27.76,19.63 25.4,17.27 J3.2
GPIO6: length 28
  TOP w0.152: U5.64 31.49,25.9 29.67,24.08 28.17,24.08 27.94,23.85 v1(26.62,23.85)
  BOTTOM w0.152: J3.1 22.86,7.49 23.01,7.65 24.71,7.65 25.1,8.03 25.1,17.4 27.46,19.76 27.46,23.01 v1(26.62,23.85)
GPIO7: length 20.5
  TOP w0.152: U5.4 18.65,29.9 18.67,29.92 18.69,29.92 18.85,29.77 v1(18.85,29.74)
  BOTTOM w0.152: v1(18.85,29.74) 17.83,30.76 10.16,30.76 7.9,28.5 7.9,23.16 7.59,22.86 J5.3
GPIO8: length 17.3
  TOP w0.152: v1(18.8,30.56) 18.64,30.4 17.65,30.4 U5.3
  BOTTOM w0.152: J5.2 7.59,26.52 7.59,28.63 10.03,31.06 18.29,31.06 v1(18.8,30.56)
GPIO9: length 15.1
  TOP w0.152: v1(18.81,31.37) 18.79,31.37 18.31,30.89 17.66,30.89 U5.2
  BOTTOM w0.152: J5.1 9.9,31.37 v1(18.81,31.37)
GPIO10: length 13.1
  TOP w0.152: U5.99 19.9,37.22 20.62,37.95 20.62,43.21 21.74,44.32 J4.3
GPIO11: length 20
  TOP w0.152: v1(24.13,34.32) 24.16,34.29 24.16,34.14 23.9,33.88 U5.91
  BOTTOM w0.152: v1(24.13,34.32) 24.13,37.52 23.01,38.63 22.68,38.63 22.4,38.91 22.08,38.91 21.74,39.26 21.45,39.26 20.8,39.9 20.8,40.21 19.79,41.22 19.79,43.03 22.35,45.59 23.67,45.59 24.08,45.19 24.08,44.48 24.23,44.32 J4.2
GPIO12: length 30.6
  TOP w0.152: U5.90 24.4,32.19 24.57,32.02 v1(24.6,32.02)
  BOTTOM w0.152: J4.1 26.67,45.59 26.67,47.5 26.04,48.13 20.7,48.13 19.48,46.91 19.48,41.1 20.5,40.08 20.5,39.77 21.32,38.95 21.61,38.95 21.95,38.61 22.28,38.61 22.56,38.33 22.89,38.33 23.82,37.39 23.82,34.77 23.59,34.54 23.59,33.02 v1(24.6,32.02)
IMU_INT: length 16.7
  TOP w0.152: U2.12 34.17,11.43 v1(34.49,11.1) 35.59,11.1 TP4.1 ; U5.43 27.9,16.72 27.61,16.43 27.61,14.94 27.13,14.46 v1(27.13,13.92)
  BOTTOM w0.152: v1(34.49,11.1) 33.83,11.1 33.65,11.28 28.96,11.28 27.13,13.11 v1(27.13,13.92)
LED1: length 6.3
  TOP w0.152: U5.6 16.59,28.9 15.14,30.35 13.49,30.35 12.89,30.96 DS2.1
LED2: length 6.9
  TOP w0.152: U5.7 17.65,28.4 16.66,28.4 15.01,30.05 12.24,30.05 12.1,30.18 DS3.1
MESH_#CS: length 17.8
  TOP w0.152: v1(30.38,42.9) TP6.1 30.86,44.5 30.86,45.19 31.7,46.02 34.64,46.02 34.91,46.3 U3.2 ; v1(31.7,34.95) 31.7,34.42 31.4,34.12 U5.76
  BOTTOM w0.152: v1(30.38,42.9) 31.01,42.27 31.17,42.27 31.67,41.76 31.67,35.51 31.7,35.48 v1(31.7,34.95)
MESH_CE: length 18.9
  TOP w0.152: U5.80 29.4,34.1 29.79,34.49 29.79,35.25 29.64,35.4 29.64,36.09 30.23,36.68 30.23,39.04 30.18,39.09 30.18,39.81 29.84,40.14 29.84,41.05 29.77,41.12 29.77,44.27 30.4,44.91 TP5.1 30.91,46.33 34.51,46.33 34.65,46.46 34.65,46.61 34.83,46.8 U3.1
MESH_IRQ: length 18.3
  TOP w0.152: U5.73 32.22,30.4 32.05,30.57 32.05,34.52 33.32,35.79 ; TP10.1 33.32,35.79 ; 33.32,35.79 33.32,38.85 33.58,39.11 33.58,40.83 33.66,40.91 33.66,41.31 33.63,41.33 33.63,41.78 33.66,41.8 33.66,42.75 33.81,42.9 35.37,42.9 35.96,43.48 U3.6
MISO0: length 16.3
  TOP w0.152: U5.79 29.9,34.08 30.1,34.27 30.1,35.37 29.94,35.52 29.94,35.96 TP9.1 31.39,37.41 31.39,42.29 31.78,42.67 31.78,44.81 32.08,45.11 34.49,45.11 34.62,44.98 34.62,44.93 34.75,44.8 U3.5
MOSI0: length 16.2
  TOP w0.152: v1(30.78,38.4) TP8.1 30.78,39.95 30.99,40.16 30.99,42.32 31.47,42.8 31.47,44.93 31.95,45.42 34.63,45.42 34.75,45.3 U3.4 ; U5.78 30.4,35.12 30.48,35.2 v1(30.48,35.74)
  BOTTOM w0.152: v1(30.78,38.4) 30.78,37.87 30.48,37.56 v1(30.48,35.74)
POWERON: length 15.3
  TOP w0.152: v1(17.63,32.11) 17.65,32.08 17.65,31.4 U5.1 ; R31.2 4.11,31.69 4.09,31.67 v1(4.09,31.6)
  BOTTOM w0.152: v1(17.63,32.11) 17.19,31.67 9.78,31.67 9.7,31.6 v1(4.09,31.6)
PTA0/JTAG_TCLK/SWD_CLK/EZP_CLK/: length 32.3
  TOP w0.152: U5.34 23.4,18.58 23.99,19.16 23.99,21.45 25.19,22.66 25.44,22.66 25.44,22.66 29.03,22.66 29.08,22.61 29.4,22.61 v1(29.78,22.23) ; J7.4 42.3,15.87 R18.2 42.16,15.88 41.22,14.94 38.59,14.94 38.28,15.24 37.39,15.24 36.68,15.95 35.62,15.95 v1(35.17,16.41)
  BOTTOM w0.152: v1(35.17,16.41) 34.63,16.41 34.63,16.41 34.47,16.41 34.19,16.69 29.92,16.69 29.44,17.17 29.44,20.57 29.11,20.9 29.11,21.56 v1(29.78,22.23)
PTA1/JTAG_TDI/EZP_DI/UART0_RX/F: length 32.7
  TOP w0.152: v1(34.04,17.63) 34.57,17.63 34.67,17.53 34.9,17.53 35.12,17.3 35.51,17.3 36.25,16.56 36.93,16.56 37.64,15.85 38.54,15.85 38.84,15.54 40.79,15.54 41.3,16.05 41.3,17.04 41.53,17.27 41.53,18.26 41.68,18.41 R17.2 42.3,18.41 44.41,18.41 ; v1(30.29,21.62) 29.63,21.62 28.9,22.35 25.32,22.35 24.29,21.32 24.29,18.97 23.9,18.58 U5.35
  BOTTOM w0.152: v1(30.29,21.62) 30.29,21.29 30.35,21.23 30.35,20.78 30.12,20.56 30.12,20.35 30.05,20.27 30.05,17.45 30.2,17.3 30.53,17.3 33.18,17.3 33.51,17.63 v1(34.04,17.63)
PTA2/JTAG_TDO/TRACE_SWO/EZP_D0/: length 30.3
  TOP w0.152: v1(34.67,17) 35.38,17 36.12,16.26 36.8,16.26 37.51,15.54 38.41,15.54 38.71,15.24 40.92,15.24 41.61,15.93 41.61,16.92 41.83,17.14 J7.6 ; v1(29.82,21.01) 28.78,22.05 25.44,22.05 24.6,21.2 24.6,18.77 24.4,18.58 U5.36
  BOTTOM w0.152: v1(34.67,17) 30.4,17 30.04,17 29.74,17.3 29.74,20.4 29.82,20.47 v1(29.82,21.01)
PTA3/JTAG_TMS/SWD_DIO/UART0_RTS: length 28.4
  TOP w0.152: U5.37 24.9,21.07 25.57,21.74 28.18,21.74 28.91,21.01 v1(28.91,20.35) ; J7.2 44.4,14.6 R19.2 41.68,14.6 41.65,14.63 38.46,14.63 38.16,14.94 37.26,14.94 36.55,15.65 v1(35.17,15.65)
  BOTTOM w0.152: v1(35.17,15.65) 34.71,16.1 34.51,16.1 34.5,16.11 34.34,16.11 34.06,16.39 29.79,16.39 29.13,17.04 29.13,17.3 29.13,19.56 28.91,19.79 v1(28.91,20.35)
PTA18/EXTAL0/FTM0_FLT2/FTM_CLKI: length 3.5
  TOP w0.152: Y2.3 32.53,15.45 32.98,15.9 32.98,16.68 32.01,17.65 U5.50
PTA19/XTAL0/FTM1_FLT0/FTM_CLKIN: length 3.3
  TOP w0.152: U5.51 33.15,17.13 33.54,16.73 Y2.1
SCK0: length 17.1
  TOP w0.152: v1(30.93,34.92) 30.93,34.11 30.9,34.08 U5.77 ; U3.3 34.84,45.8 34.76,45.72 31.83,45.72 31.17,45.06 31.17,42.93 30.38,42.14 TP7.1 v1(30.38,40.36)
  BOTTOM w0.152: v1(30.93,34.92) 30.93,35.46 31.06,35.59 31.06,37.72 31.09,37.74 31.09,37.96 31.32,38.18 31.32,38.63 30.38,39.57 v1(30.38,40.36)
SCL0: length 38.3
  TOP w0.152: U5.55 31.94,21.4 v1(31.8,21.26) ; U2.23 31.89,14.65 31.27,15.27 30.39,15.27 30.22,15.09 v1(30.22,14.56) ; v1(35.21,14.05) 35.21,14.5 35.38,14.68 36.65,14.68 36.8,14.54 R11.1 36.8,13.41 36.8,13.4 TP2.1 37.64,12.4 38.25,11.79 38.76,11.79 39.06,12.09 41.07,12.09 41.5,11.66 41.5,10.02 41.81,9.72 41.81,9.7 42.52,8.99 U4.42
  BOTTOM w0.152: v1(30.22,14.56) 29.84,14.18 29.84,13.67 30.22,13.29 30.66,13.29 30.9,13.54 34.69,13.54 v1(35.21,14.05) 35.58,14.43 35.82,14.43 36,14.62 36,16.85 34.39,18.47 33.69,18.47 33.46,18.24 33.25,18.24 32.92,17.91 30.81,17.91 30.66,18.06 30.66,20.02 30.73,20.09 30.73,20.3 30.96,20.53 30.96,21.11 31.11,21.26 v1(31.8,21.26)
SDA0: length 35.4
  TOP w0.152: U5.56 32.13,21.9 v1(31.85,22.17) ; v1(34.49,14.33) 35.15,14.99 36.78,14.99 37.13,14.63 38.03,14.63 38.51,14.15 R10.1 38.51,13.41 38.51,13.4 TP1.1 41.2,12.4 41.81,11.79 41.81,10.15 42.11,9.84 42.11,9.83 42.92,9.03 U4.41 ; v1(31.03,14.73) 31.04,14.72 31.04,14.38 31.19,14.23 U2.24
  BOTTOM w0.152: v1(31.85,22.17) 31.47,21.8 31.22,21.8 30.66,21.23 30.66,20.66 30.43,20.43 30.43,20.22 30.35,20.14 30.35,17.76 30.51,17.61 30.65,17.61 33.05,17.61 33.38,17.94 33.59,17.94 33.82,18.16 34.26,18.16 35.7,16.73 35.7,14.85 35.59,14.74 34.9,14.74 v1(34.49,14.33) 34.01,13.84 31.19,13.84 31.03,14 v1(31.03,14.73)
SDB: length 38.9
  TOP w0.152: U4.36 44.91,8.92 45.01,9.02 v1(45.01,9.52) R14.2 ; v1(49.28,11.56) TP11.1 v1(46.38,9.52) ; U5.54 34.08,20.9 34.72,20.26 34.72,18.56 35.38,17.91 35.76,17.91 36.5,17.17 37.18,17.17 37.89,16.46 38.79,16.46 39.09,16.15 40.54,16.15 40.69,16.31 40.69,17.3 40.92,17.52 40.92,18.88 41.68,19.64 41.68,20.79 41.82,20.92 42.77,20.92 42.94,20.75 44.01,20.75 44.2,20.93 44.42,20.93 44.83,21.34 v1(45.75,21.34)
  BOTTOM w0.152: v1(49.28,11.56) 48.71,11.56 48.29,11.97 48.29,13.4 45.75,15.95 v1(45.75,21.34) ; v1(46.38,9.52) v1(45.01,9.52)
